# Altium PCB STM32F407ZGT6.pcbdoc
Units mm, origin at the board's own origin, x right, y up, seen from the top; angles counter-clockwise.
Board outline 48.4 x 49.81 mm, 2 copper layers (Top Layer, Bottom Layer); 1 components, 0 nets, 144 pads, 0 vias.
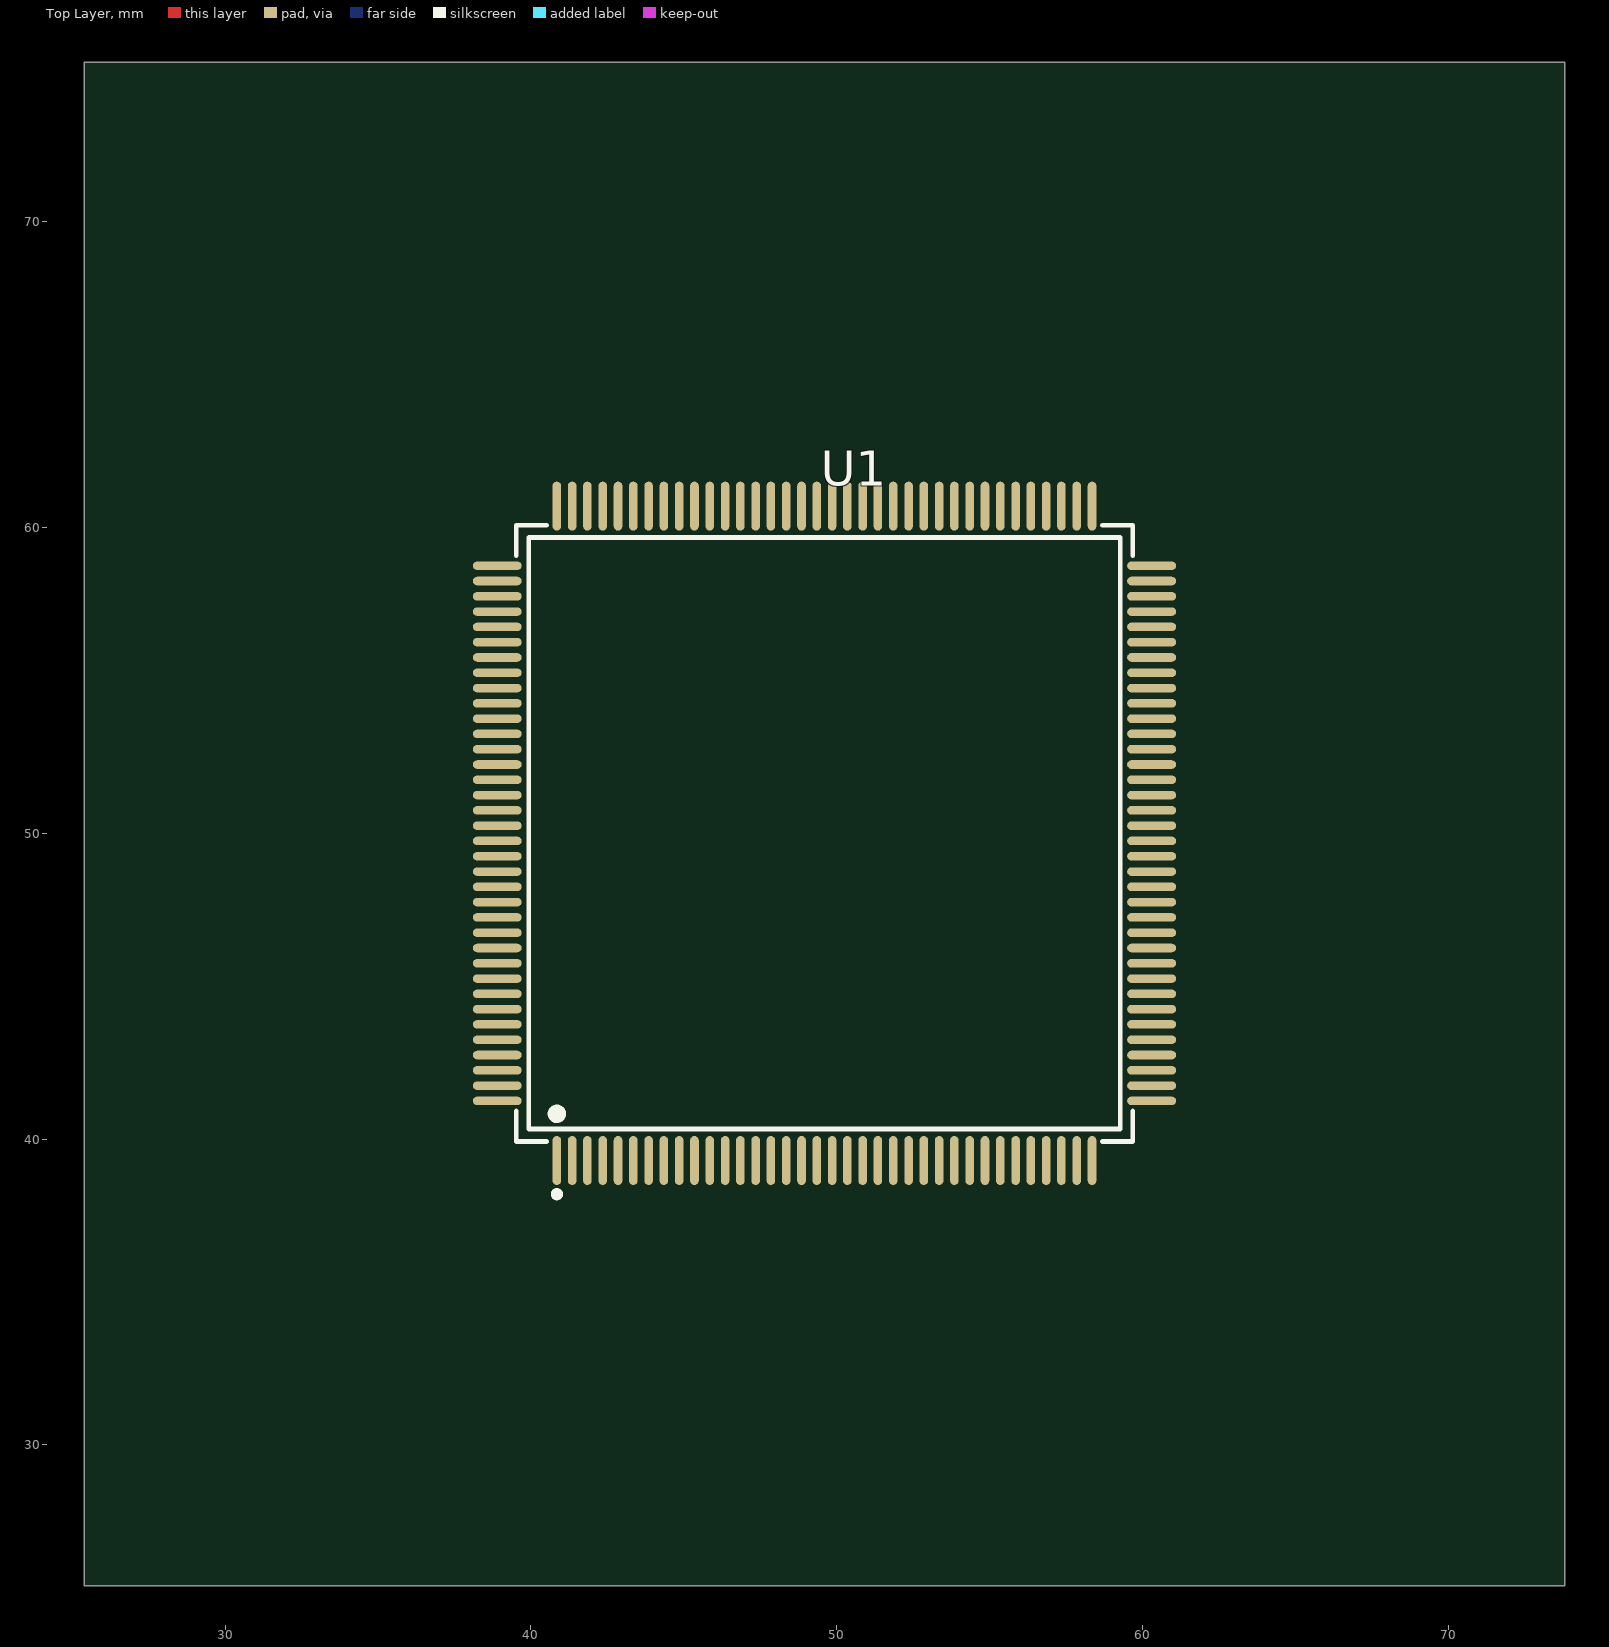
[diagram p0: Top Layer view]
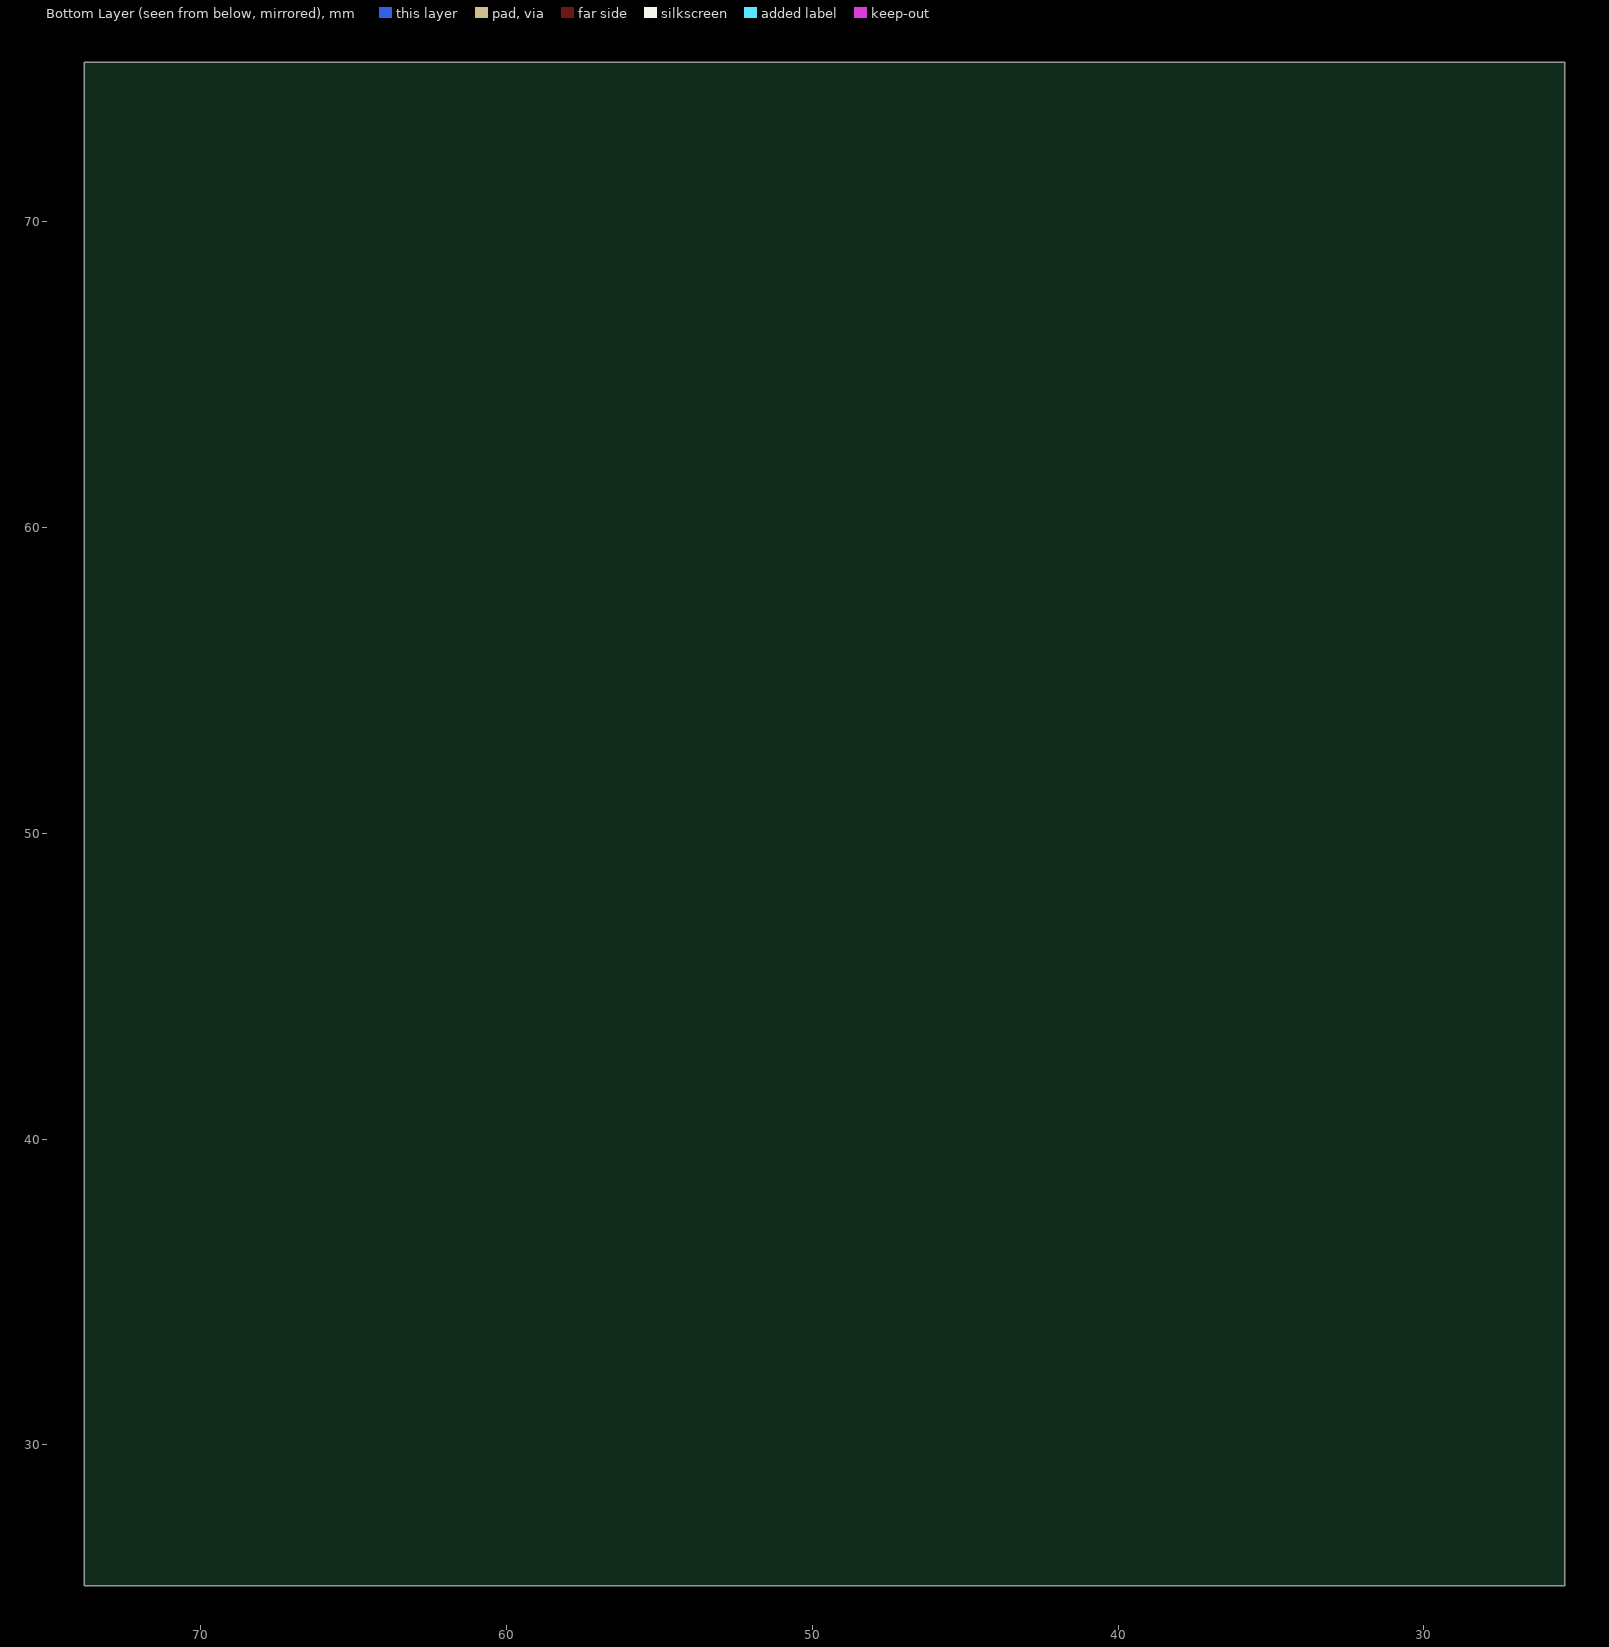
[diagram p1: Bottom Layer view, seen from below]

## Layer stack, top to bottom
Top Layer: signal copper (thickness not stored)
Dielectric: dielectric 0.32, FR-4, Dk 4.8
Bottom Layer: signal copper (thickness not stored)

## Board outline
73.8,25.4 25.4,25.4 25.4,75.21 73.8,75.21

## Components (designator, comment, footprint, x,y, rotation, side; value= is the part's Value field where it differs from the comment)
U1 "LQFP-144_L20.0-W20.0-P0.50-LS22.0-BL" LQFP-144_L20.0-W20.0-P0.50-LS22.0-BL 49.6,50 r0 top

## Footprints (in the part's own frame and the unit in brackets; to place one, negate y for a bottom-side part, rotate by r counter-clockwise, add the part's x,y. Pads: shape width x height; smd on the part's side, far side on the other; paste and mask are expansions set on the pad)
LQFP-144_L20.0-W20.0-P0.50-LS22.0-BL [mm]
  oval 0.28x1.6 smd: 1(-8.75,-10.7) 2(-8.25,-10.7) 3(-7.75,-10.7) 4(-7.25,-10.7) 5(-6.75,-10.7) 6(-6.25,-10.7) 7(-5.75,-10.7) 8(-5.25,-10.7) 9(-4.75,-10.7) 10(-4.25,-10.7) 11(-3.75,-10.7) 12(-3.25,-10.7) 13(-2.75,-10.7) 14(-2.25,-10.7) 15(-1.75,-10.7) 16(-1.25,-10.7) 17(-0.75,-10.7) 18(-0.25,-10.7) 19(0.25,-10.7) 20(0.75,-10.7) 21(1.25,-10.7) 22(1.75,-10.7) 23(2.25,-10.7) 24(2.75,-10.7) 25(3.25,-10.7) 26(3.75,-10.7) 27(4.25,-10.7) 28(4.75,-10.7) 29(5.25,-10.7) 30(5.75,-10.7) 31(6.25,-10.7) 32(6.75,-10.7) 33(7.25,-10.7) 34(7.75,-10.7) 35(8.25,-10.7) 36(8.75,-10.7) 73(8.75,10.7) 74(8.25,10.7) 75(7.75,10.7) 76(7.25,10.7) 77(6.75,10.7) 78(6.25,10.7) 79(5.75,10.7) 80(5.25,10.7) 81(4.75,10.7) 82(4.25,10.7) 83(3.75,10.7) 84(3.25,10.7) 85(2.75,10.7) 86(2.25,10.7) 87(1.75,10.7) 88(1.25,10.7) 89(0.75,10.7) 90(0.25,10.7) 91(-0.25,10.7) 92(-0.75,10.7) 93(-1.25,10.7) 94(-1.75,10.7) 95(-2.25,10.7) 96(-2.75,10.7) 97(-3.25,10.7) 98(-3.75,10.7) 99(-4.25,10.7) 100(-4.75,10.7) 101(-5.25,10.7) 102(-5.75,10.7) 103(-6.25,10.7) 104(-6.75,10.7) 105(-7.25,10.7) 106(-7.75,10.7) 107(-8.25,10.7) 108(-8.75,10.7)
  oval 1.6x0.28 smd: 37(10.7,-8.75) 38(10.7,-8.25) 39(10.7,-7.75) 40(10.7,-7.25) 41(10.7,-6.75) 42(10.7,-6.25) 43(10.7,-5.75) 44(10.7,-5.25) 45(10.7,-4.75) 46(10.7,-4.25) 47(10.7,-3.75) 48(10.7,-3.25) 49(10.7,-2.75) 50(10.7,-2.25) 51(10.7,-1.75) 52(10.7,-1.25) 53(10.7,-0.75) 54(10.7,-0.25) 55(10.7,0.25) 56(10.7,0.75) 57(10.7,1.25) 58(10.7,1.75) 59(10.7,2.25) 60(10.7,2.75) 61(10.7,3.25) 62(10.7,3.75) 63(10.7,4.25) 64(10.7,4.75) 65(10.7,5.25) 66(10.7,5.75) 67(10.7,6.25) 68(10.7,6.75) 69(10.7,7.25) 70(10.7,7.75) 71(10.7,8.25) 72(10.7,8.75) 109(-10.7,8.75) 110(-10.7,8.25) 111(-10.7,7.75) 112(-10.7,7.25) 113(-10.7,6.75) 114(-10.7,6.25) 115(-10.7,5.75) 116(-10.7,5.25) 117(-10.7,4.75) 118(-10.7,4.25) 119(-10.7,3.75) 120(-10.7,3.25) 121(-10.7,2.75) 122(-10.7,2.25) 123(-10.7,1.75) 124(-10.7,1.25) 125(-10.7,0.75) 126(-10.7,0.25) 127(-10.7,-0.25) 128(-10.7,-0.75) 129(-10.7,-1.25) 130(-10.7,-1.75) 131(-10.7,-2.25) 132(-10.7,-2.75) 133(-10.7,-3.25) 134(-10.7,-3.75) 135(-10.7,-4.25) 136(-10.7,-4.75) 137(-10.7,-5.25) 138(-10.7,-5.75) 139(-10.7,-6.25) 140(-10.7,-6.75) 141(-10.7,-7.25) 142(-10.7,-7.75) 143(-10.7,-8.25) 144(-10.7,-8.75)
  silkscreen extent -10.08,-11.9 10.08,10.08

## Nets (pads, with @x,y where several pads share a name; then routed paths per layer and width w, separated by ;. In a path a pad name is that pad's centre, name@x,y a point inside that pad or via, vN(x,y) a via of type N, cw(c..) or ccw(c..) an arc to the next point about the centre after c; other vN are vias at no path point)
pads on no net: U1.1 U1.2 U1.3 U1.4 U1.5 U1.6 U1.7 U1.8 U1.9 U1.10 U1.11 U1.12 U1.13 U1.14 U1.15 U1.16 U1.17 U1.18 U1.19 U1.20 U1.21 U1.22 U1.23 U1.24 U1.25 U1.26 U1.27 U1.28 U1.29 U1.30 U1.31 U1.32 U1.33 U1.34 U1.35 U1.36 U1.37 U1.38 U1.39 U1.40 U1.41 U1.42 U1.43 U1.44 U1.45 U1.46 U1.47 U1.48 U1.49 U1.50 U1.51 U1.52 U1.53 U1.54 U1.55 U1.56 U1.57 U1.58 U1.59 U1.60 U1.61 U1.62 U1.63 U1.64 U1.65 U1.66 U1.67 U1.68 U1.69 U1.70 U1.71 U1.72 U1.73 U1.74 U1.75 U1.76 U1.77 U1.78 U1.79 U1.80 U1.81 U1.82 U1.83 U1.84 U1.85 U1.86 U1.87 U1.88 U1.89 U1.90 U1.91 U1.92 U1.93 U1.94 U1.95 U1.96 U1.97 U1.98 U1.99 U1.100 U1.101 U1.102 U1.103 U1.104 U1.105 U1.106 U1.107 U1.108 U1.109 U1.110 U1.111 U1.112 U1.113 U1.114 U1.115 U1.116 U1.117 U1.118 U1.119 U1.120 U1.121 U1.122 U1.123 U1.124 U1.125 U1.126 U1.127 U1.128 U1.129 U1.130 U1.131 U1.132 U1.133 U1.134 U1.135 U1.136 U1.137 U1.138 U1.139 U1.140 U1.141 U1.142 U1.143 U1.144